# Altium PCB PCB1.PcbDoc (part 2 of 2)
Units mm, origin at the board's own origin, x right, y up, seen from the top; angles counter-clockwise.
Board outline 101 x 101.73 mm, 2 copper layers (Top Layer, Bottom Layer); 185 components, 17 nets, 503 pads, 7 vias.
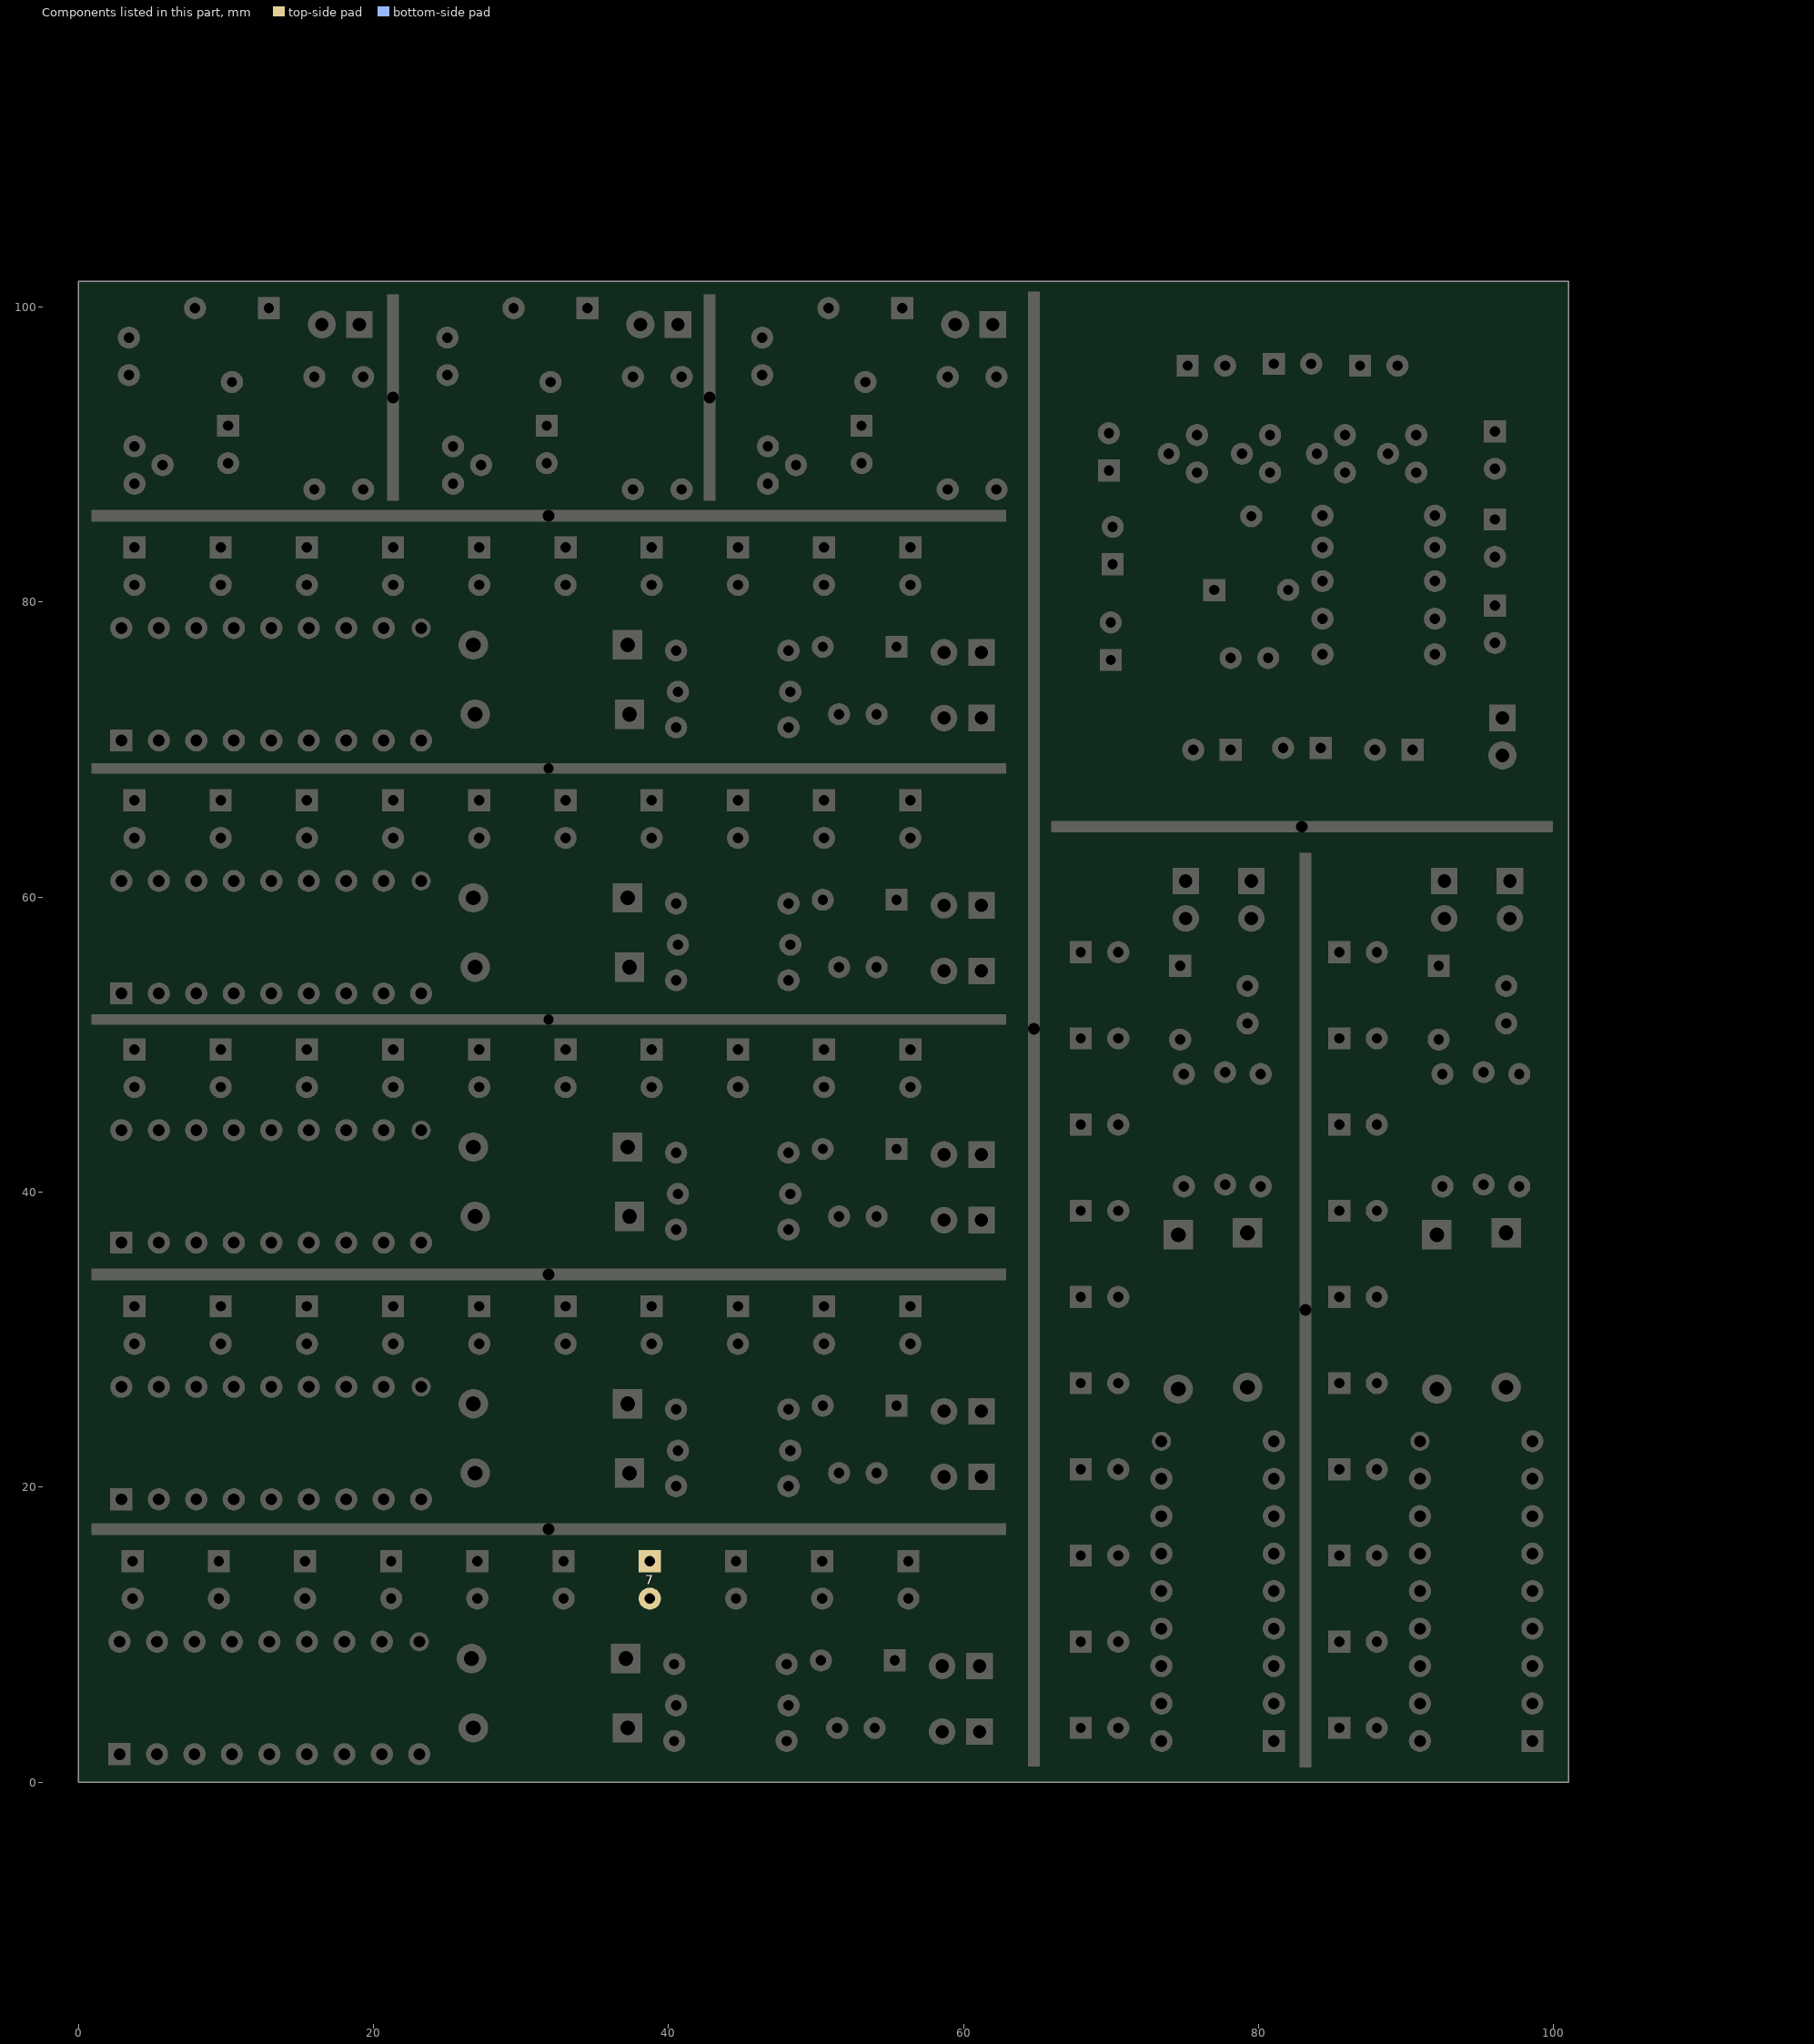
[diagram p2: the components of this part, seen from the top]

## Via types
v1: diameter 1.27, hole 0.711, Top Layer to Bottom Layer, 7 vias

## Nets (pads, with @x,y where several pads share a name; then routed paths per layer and width w, separated by ;. In a path a pad name is that pad's centre, name@x,y a point inside that pad or via, vN(x,y) a via of type N, cw(c..) or ccw(c..) an arc to the next point about the centre after c; other vN are vias at no path point) (continued)
copper on no net: | length 3967.3
  Top Layer w0.508: 2.921,19.177 4.191,20.447 4.191,28.346 3.81,28.727 3.81,29.718 ; 2.921,36.576 4.191,37.846 4.191,45.745 3.81,46.126 3.81,47.117 ; 2.921,53.467 4.191,54.737 4.191,62.636 3.81,63.017 3.81,64.008 ; 2.921,70.612 4.191,71.882 4.191,79.781 3.81,80.162 3.81,81.153 ; 3.429,95.377 5.334,97.282 14.986,97.282 16.51,98.806 ; 5.715,89.281 7.239,90.805 7.239,91.734 10.414,94.909 ; 8.001,19.177 9.271,20.447 9.271,28.067 8.382,28.956 8.382,30.988 9.652,32.258 ; 8.001,36.576 9.271,37.846 9.271,45.466 8.382,46.355 8.382,48.387 9.652,49.657 ; 8.001,53.467 9.271,54.737 9.271,62.357 8.382,63.246 8.382,65.278 9.652,66.548 ; 8.001,70.612 9.271,71.882 9.271,79.502 8.382,80.391 8.382,82.423 9.652,83.693 ; 10.541,26.797 11.811,28.067 16.383,28.067 16.891,27.559 16.891,26.047 17.399,25.539 18.923,25.539 19.431,26.047 19.431,27.737 19.939,28.245 23.393,28.245 24.867,29.718 27.178,29.718 ; 10.541,44.196 11.811,45.466 16.383,45.466 16.891,44.958 16.891,43.446 17.399,42.938 18.923,42.938 19.431,43.446 19.431,45.136 19.939,45.644 23.393,45.644 24.867,47.117 27.178,47.117 ; 10.541,61.087 11.811,62.357 16.383,62.357 16.891,61.849 16.891,60.337 17.399,59.829 18.923,59.829 19.431,60.337 19.431,62.027 19.939,62.535 23.393,62.535 24.867,64.008 27.178,64.008 ; 10.541,78.232 11.811,79.502 16.383,79.502 16.891,78.994 16.891,77.482 17.399,76.974 18.923,76.974 19.431,77.482 19.431,79.172 19.939,79.68 23.393,79.68 24.867,81.153 27.178,81.153 ; 13.081,19.177 16.891,22.987 23.461,22.987 25.256,24.782 25.256,26.272 26.187,27.203 35.685,27.203 37.234,25.654 ; 13.081,26.797 15.101,24.777 23.151,24.777 24.409,26.035 24.409,26.848 25.527,27.965 31.267,27.965 33.02,29.718 ; 13.081,36.576 16.891,40.386 23.461,40.386 25.256,42.181 25.256,43.671 26.187,44.602 35.685,44.602 37.234,43.053 ; 13.081,44.196 15.101,42.176 23.151,42.176 24.409,43.434 24.409,44.247 25.527,45.364 31.267,45.364 33.02,47.117 ; 13.081,53.467 16.891,57.277 23.461,57.277 25.256,59.072 25.256,60.562 26.187,61.493 35.685,61.493 37.234,59.944 ; 13.081,61.087 15.101,59.067 23.151,59.067 24.409,60.325 24.409,61.138 25.527,62.255 31.267,62.255 33.02,64.008 ; 13.081,70.612 16.891,74.422 23.461,74.422 25.256,76.217 25.256,77.707 26.187,78.638 35.685,78.638 37.234,77.089 ; 13.081,78.232 15.101,76.212 23.151,76.212 24.409,77.47 24.409,78.283 25.527,79.4 31.267,79.4 33.02,81.153 ; 18.161,26.797 18.161,29.718 19.431,30.988 43.434,30.988 44.704,29.718 ; 18.161,44.196 18.161,47.117 19.431,48.387 43.434,48.387 44.704,47.117 ; 18.161,61.087 18.161,64.008 19.431,65.278 43.434,65.278 44.704,64.008 ; 18.161,78.232 18.161,81.153 19.431,82.423 43.434,82.423 44.704,81.153 ; 23.241,19.177 24.511,19.177 24.892,18.796 49.403,18.796 51.562,20.955 ; 23.241,36.576 24.511,36.576 24.892,36.195 49.403,36.195 51.562,38.354 ; 23.241,53.467 24.511,53.467 24.892,53.086 49.403,53.086 51.562,55.245 ; 23.241,70.612 24.511,70.612 24.892,70.231 49.403,70.231 51.562,72.39 ; 25.019,95.377 26.924,97.282 36.576,97.282 38.1,98.806 ; 26.774,25.654 31.473,20.955 37.361,20.955 ; 26.774,43.053 31.473,38.354 37.361,38.354 ; 26.774,59.944 31.473,55.245 37.361,55.245 ; 26.774,77.089 31.473,72.39 37.361,72.39 ; 27.305,89.281 28.829,90.805 28.829,91.734 32.004,94.909 ; v1(34.315,25.654) 35.839,24.13 38.481,24.13 38.862,24.511 38.862,29.718 ; v1(34.315,43.053) 35.839,41.529 38.481,41.529 38.862,41.91 38.862,47.117 ; v1(34.315,59.944) 35.839,58.42 38.481,58.42 38.862,58.801 38.862,64.008 ; v1(34.315,77.089) 35.839,75.565 38.481,75.565 38.862,75.946 38.862,81.153 ; 46.355,95.377 48.26,97.282 57.912,97.282 59.436,98.806 ; 48.133,20.066 48.133,20.32 48.26,20.447 48.26,22.479 48.133,22.606 48.133,25.273 ; 48.133,37.465 48.133,37.719 48.26,37.846 48.26,39.878 48.133,40.005 48.133,42.672 ; 48.133,54.356 48.133,54.61 48.26,54.737 48.26,56.769 48.133,56.896 48.133,59.563 ; 48.133,71.501 48.133,71.755 48.26,71.882 48.26,73.914 48.133,74.041 48.133,76.708 ; 48.641,89.281 50.165,90.805 50.165,91.734 53.34,94.909 ; 56.388,32.258 61.214,27.432 61.214,25.146 ; 56.388,49.657 61.214,44.831 61.214,42.545 ; 56.388,66.548 61.214,61.722 61.214,59.436 ; 56.388,83.693 61.214,78.867 61.214,76.581 ; 58.674,20.701 58.674,25.146 ; 58.674,38.1 58.674,42.545 ; 58.674,54.991 58.674,59.436 ; 58.674,72.136 58.674,76.581 ; 67.945,9.525 69.215,8.255 71.247,8.255 72.136,9.144 79.756,9.144 81.026,7.874 ; 67.945,56.261 72.771,61.087 75.057,61.087 ; 69.85,88.9 71.476,87.274 71.476,83.922 70.104,82.55 71.349,81.305 71.349,77.445 69.977,76.073 ; 69.977,78.613 68.834,79.756 68.834,83.82 70.104,85.09 68.58,86.614 68.58,90.17 69.85,91.44 69.85,96.139 71.628,97.917 90.424,97.917 91.694,96.647 91.694,94.488 90.526,93.32 88.392,93.32 87.503,92.431 87.503,89.281 88.011,88.773 90.678,88.773 ; 70.485,3.683 71.476,3.683 71.857,4.064 79.756,4.064 81.026,2.794 ; 70.485,27.051 70.485,24.74 71.958,23.266 71.958,19.812 72.466,19.304 74.156,19.304 74.664,18.796 74.664,17.272 74.156,16.764 72.644,16.764 72.136,16.256 72.136,11.684 73.406,10.414 ; 70.485,32.893 72.238,31.14 72.238,25.4 73.355,24.282 74.168,24.282 75.426,23.024 75.426,14.974 73.406,12.954 ; 70.485,38.735 75.692,38.735 76.073,38.354 76.073,35.712 v1(74.549,34.188) ; 70.485,44.577 69.215,43.307 69.215,19.304 70.485,18.034 73.406,18.034 ; 74.549,26.647 79.248,31.346 79.248,37.234 ; 74.549,37.107 73,35.558 73,26.06 73.931,25.129 75.421,25.129 77.216,23.334 77.216,16.764 81.026,12.954 ; 74.93,48.006 77.597,48.006 77.724,48.133 79.756,48.133 79.883,48.006 80.137,48.006 ; 75.057,58.547 79.502,58.547 ; 75.819,88.773 77.724,90.678 77.724,96.012 ; 75.819,91.313 73.279,91.313 72.644,90.678 72.644,81.661 78.105,76.2 ; 77.002,80.812 77.423,80.391 77.55,80.391 79.375,78.566 79.375,69.723 80.899,68.199 91.313,68.199 91.948,68.834 91.948,76.454 ; 78.867,90.043 78.867,86.447 79.502,85.812 79.502,83.312 82.002,80.812 82.002,77.557 80.645,76.2 ; 79.248,51.435 81.407,49.276 81.407,24.765 81.026,24.384 81.026,23.114 ; 84.328,76.454 84.328,78.867 84.328,81.407 84.328,83.693 ; 84.328,85.852 82.677,87.503 82.677,91.821 86.868,96.012 ; 85.471,9.525 86.741,8.255 88.773,8.255 89.662,9.144 97.282,9.144 98.552,7.874 ; 85.471,56.261 90.297,61.087 92.583,61.087 ; 85.852,88.773 85.852,72.009 87.884,69.977 ; 88.011,3.683 89.002,3.683 89.383,4.064 97.282,4.064 98.552,2.794 ; 88.011,27.051 88.011,24.74 89.484,23.266 89.484,19.812 89.992,19.304 91.682,19.304 92.19,18.796 92.19,17.272 91.682,16.764 90.17,16.764 89.662,16.256 89.662,11.684 90.932,10.414 ; 88.011,32.893 89.764,31.14 89.764,25.4 90.881,24.282 91.694,24.282 92.952,23.024 92.952,14.974 90.932,12.954 ; 88.011,38.735 93.218,38.735 93.599,38.354 93.599,35.712 v1(92.075,34.188) ; 88.011,44.577 86.741,43.307 86.741,19.304 88.011,18.034 90.932,18.034 ; 90.424,69.977 90.424,82.169 91.948,83.693 ; 92.075,26.647 96.774,31.346 96.774,37.234 ; 92.075,37.107 90.526,35.558 90.526,26.06 91.457,25.129 92.947,25.129 94.742,23.334 94.742,16.764 98.552,12.954 ; 92.456,48.006 95.123,48.006 95.25,48.133 97.282,48.133 97.409,48.006 97.663,48.006 ; 92.583,58.547 97.028,58.547 ; 96.012,77.216 97.282,78.486 97.282,81.788 96.012,83.058 97.282,84.328 97.282,87.757 96.012,89.027 ; 96.012,79.756 94.742,81.026 94.742,84.328 96.012,85.598 94.742,86.868 94.742,90.297 96.012,91.567 ; 96.774,51.435 98.933,49.276 98.933,24.765 98.552,24.384 98.552,23.114
  Bottom Layer w0.508: 2.921,26.797 5.842,29.718 9.652,29.718 ; 2.921,44.196 5.842,47.117 9.652,47.117 ; 2.921,61.087 5.842,64.008 9.652,64.008 ; 2.921,78.232 5.842,81.153 9.652,81.153 ; 3.429,95.377 2.286,94.234 2.286,89.535 3.81,88.011 ; 3.429,97.917 5.421,99.909 7.914,99.909 7.914,97.409 10.414,94.909 ; 3.81,32.258 9.652,32.258 15.494,32.258 21.336,32.258 27.178,32.258 33.02,32.258 38.862,32.258 44.704,32.258 50.546,32.258 56.388,32.258 ; 3.81,49.657 9.652,49.657 15.494,49.657 21.336,49.657 27.178,49.657 33.02,49.657 38.862,49.657 44.704,49.657 50.546,49.657 56.388,49.657 ; 3.81,66.548 9.652,66.548 15.494,66.548 21.336,66.548 27.178,66.548 33.02,66.548 38.862,66.548 44.704,66.548 50.546,66.548 56.388,66.548 ; 3.81,83.693 9.652,83.693 15.494,83.693 21.336,83.693 27.178,83.693 33.02,83.693 38.862,83.693 44.704,83.693 50.546,83.693 56.388,83.693 ; 3.81,90.551 4.445,91.186 8.382,91.186 10.16,89.408 ; 5.461,19.177 6.719,17.919 9.283,17.919 10.541,19.177 14.757,23.393 24.463,23.393 26.901,20.955 29.949,24.003 44.196,24.003 48.133,20.066 ; 5.461,26.797 3.886,25.222 2.159,25.222 1.651,25.73 1.651,30.099 2.54,30.988 14.224,30.988 15.494,29.718 ; 5.461,36.576 6.719,35.318 9.283,35.318 10.541,36.576 14.757,40.792 24.463,40.792 26.901,38.354 29.949,41.402 44.196,41.402 48.133,37.465 ; 5.461,44.196 3.886,42.621 2.159,42.621 1.651,43.129 1.651,47.498 2.54,48.387 14.224,48.387 15.494,47.117 ; 5.461,53.467 6.719,52.209 9.283,52.209 10.541,53.467 14.757,57.683 24.463,57.683 26.901,55.245 29.949,58.293 44.196,58.293 48.133,54.356 ; 5.461,61.087 3.886,59.512 2.159,59.512 1.651,60.02 1.651,64.389 2.54,65.278 14.224,65.278 15.494,64.008 ; 5.461,70.612 6.719,69.354 9.283,69.354 10.541,70.612 14.757,74.828 24.463,74.828 26.901,72.39 29.949,75.438 44.196,75.438 48.133,71.501 ; 5.461,78.232 3.886,76.657 2.159,76.657 1.651,77.165 1.651,81.534 2.54,82.423 14.224,82.423 15.494,81.153 ; 8.001,26.797 9.474,28.27 19.888,28.27 21.336,29.718 ; 8.001,44.196 9.474,45.669 19.888,45.669 21.336,47.117 ; 8.001,61.087 9.474,62.56 19.888,62.56 21.336,64.008 ; 8.001,78.232 9.474,79.705 19.888,79.705 21.336,81.153 ; 10.16,91.948 11.684,91.948 16.002,87.63 ; 12.914,99.909 12.914,94.02 19.304,87.63 ; 15.621,19.177 18.161,19.177 20.193,21.209 24.273,21.209 26.035,19.447 31.41,19.447 35.204,23.241 39.878,23.241 40.64,22.479 ; 15.621,26.797 18.263,24.155 26.492,24.155 26.518,24.13 28.88,24.13 30.404,25.654 v1(34.315,25.654) ; 15.621,36.576 18.161,36.576 20.193,38.608 24.273,38.608 26.035,36.846 31.41,36.846 35.204,40.64 39.878,40.64 40.64,39.878 ; 15.621,44.196 18.263,41.554 26.492,41.554 26.518,41.529 28.88,41.529 30.404,43.053 v1(34.315,43.053) ; 15.621,53.467 18.161,53.467 20.193,55.499 24.273,55.499 26.035,53.737 31.41,53.737 35.204,57.531 39.878,57.531 40.64,56.769 ; 15.621,61.087 18.263,58.445 26.492,58.445 26.518,58.42 28.88,58.42 30.404,59.944 v1(34.315,59.944) ; 15.621,70.612 18.161,70.612 20.193,72.644 24.273,72.644 26.035,70.882 31.41,70.882 35.204,74.676 39.878,74.676 40.64,73.914 ; 15.621,78.232 18.263,75.59 26.492,75.59 26.518,75.565 28.88,75.565 30.404,77.089 v1(34.315,77.089) ; 16.002,95.25 19.304,95.25 19.05,95.504 19.05,98.806 ; 20.701,19.177 21.971,20.447 23.876,20.447 25.638,18.685 32.045,18.685 35.839,22.479 38.608,22.479 39.116,21.971 39.116,21.463 40.513,20.066 ; 20.701,26.797 22.352,28.448 45.974,28.448 47.244,29.718 50.546,29.718 ; 20.701,36.576 21.971,37.846 23.876,37.846 25.638,36.084 32.045,36.084 35.839,39.878 38.608,39.878 39.116,39.37 39.116,38.862 40.513,37.465 ; 20.701,44.196 22.352,45.847 45.974,45.847 47.244,47.117 50.546,47.117 ; 20.701,53.467 21.971,54.737 23.876,54.737 25.638,52.975 32.045,52.975 35.839,56.769 38.608,56.769 39.116,56.261 39.116,55.753 40.513,54.356 ; 20.701,61.087 22.352,62.738 45.974,62.738 47.244,64.008 50.546,64.008 ; 20.701,70.612 21.971,71.882 23.876,71.882 25.638,70.12 32.045,70.12 35.839,73.914 38.608,73.914 39.116,73.406 39.116,72.898 40.513,71.501 ; 20.701,78.232 22.352,79.883 45.974,79.883 47.244,81.153 50.546,81.153 ; 23.241,26.797 24.123,27.679 46.355,27.679 46.867,28.19 54.86,28.19 56.388,29.718 ; 23.241,44.196 24.123,45.078 46.355,45.078 46.867,45.589 54.86,45.589 56.388,47.117 ; 23.241,61.087 24.123,61.969 46.355,61.969 46.867,62.48 54.86,62.48 56.388,64.008 ; 23.241,78.232 24.123,79.114 46.355,79.114 46.867,79.625 54.86,79.625 56.388,81.153 ; 25.019,95.377 23.876,94.234 23.876,89.535 25.4,88.011 ; 25.019,97.917 27.011,99.909 29.504,99.909 29.504,97.409 32.004,94.909 ; 25.4,90.551 26.035,91.186 29.972,91.186 31.75,89.408 ; 31.75,91.948 33.274,91.948 37.592,87.63 ; 34.504,99.909 34.504,94.02 40.894,87.63 ; 37.234,25.654 38.659,25.654 39.04,25.273 40.513,25.273 45.352,25.273 47.486,27.407 53.579,27.407 55.459,25.527 ; 37.234,43.053 38.659,43.053 39.04,42.672 40.513,42.672 45.352,42.672 47.486,44.806 53.579,44.806 55.459,42.926 ; 37.234,59.944 38.659,59.944 39.04,59.563 40.513,59.563 45.352,59.563 47.486,61.697 53.579,61.697 55.459,59.817 ; 37.234,77.089 38.659,77.089 39.04,76.708 40.513,76.708 45.352,76.708 47.486,78.842 53.579,78.842 55.459,76.962 ; 37.361,20.955 39.52,18.796 59.309,18.796 61.214,20.701 ; 37.361,38.354 39.52,36.195 59.309,36.195 61.214,38.1 ; 37.361,55.245 39.52,53.086 59.309,53.086 61.214,54.991 ; 37.361,72.39 39.52,70.231 59.309,70.231 61.214,72.136 ; 37.592,95.25 40.894,95.25 40.64,95.504 40.64,98.806 ; 46.355,95.377 45.212,94.234 45.212,89.535 46.736,88.011 ; 46.355,97.917 48.347,99.909 50.84,99.909 50.84,97.409 53.34,94.909 ; 46.736,90.551 47.371,91.186 51.308,91.186 53.086,89.408 ; 48.133,25.273 49.149,25.273 49.403,25.527 50.459,25.527 51.831,24.155 57.683,24.155 58.674,25.146 ; 48.133,42.672 49.149,42.672 49.403,42.926 50.459,42.926 51.831,41.554 57.683,41.554 58.674,42.545 ; 48.133,59.563 49.149,59.563 49.403,59.817 50.459,59.817 51.831,58.445 57.683,58.445 58.674,59.436 ; 48.133,76.708 49.149,76.708 49.403,76.962 50.459,76.962 51.831,75.59 57.683,75.59 58.674,76.581 ; 53.086,91.948 54.61,91.948 58.928,87.63 ; 54.102,20.955 55.245,22.098 58.166,22.098 61.214,25.146 ; 54.102,38.354 55.245,39.497 58.166,39.497 61.214,42.545 ; 54.102,55.245 55.245,56.388 58.166,56.388 61.214,59.436 ; 54.102,72.39 55.245,73.533 58.166,73.533 61.214,76.581 ; 55.84,99.909 55.84,94.02 62.23,87.63 ; 58.928,95.25 62.23,95.25 61.976,95.504 61.976,98.806 ; 67.945,3.683 67.945,9.525 67.945,15.367 67.945,21.209 67.945,27.051 67.945,32.893 67.945,38.735 67.945,44.577 67.945,50.419 67.945,56.261 ; 70.104,82.55 73.127,79.527 83.209,79.527 83.819,80.137 90.678,80.137 91.948,81.407 ; 70.485,9.525 70.485,5.715 73.406,2.794 ; 70.485,15.367 69.215,14.097 69.215,2.413 70.104,1.524 74.473,1.524 74.981,2.032 74.981,3.759 73.406,5.334 ; 70.485,21.209 71.933,19.761 71.933,9.347 73.406,7.874 ; 70.485,50.419 70.485,47.117 71.755,45.847 71.755,22.225 73.406,20.574 ; 70.485,56.261 72.013,54.733 72.013,46.74 72.524,46.228 72.524,23.996 73.406,23.114 ; 73.406,15.494 76.048,18.136 76.048,26.365 76.073,26.391 76.073,28.753 74.549,30.277 v1(74.549,34.188) ; 73.914,90.043 78.867,90.043 83.947,90.043 88.773,90.043 ; 74.549,37.107 74.549,38.532 74.93,38.913 74.93,40.386 74.93,45.225 72.796,47.359 72.796,53.452 74.676,55.332 ; 74.93,48.006 74.93,49.022 74.676,49.276 74.676,50.332 76.048,51.704 76.048,57.556 75.057,58.547 ; 75.057,61.087 78.105,58.039 78.105,55.118 79.248,53.975 ; 75.184,96.012 76.556,94.64 79.527,94.64 81.026,96.139 82.398,94.767 85.623,94.767 86.868,96.012 ; 75.565,69.977 76.835,68.707 80.264,68.707 81.661,70.104 83.566,68.199 86.106,68.199 87.884,69.977 ; 75.819,91.313 80.772,91.313 85.852,91.313 90.678,91.313 ; 77.724,40.513 76.962,39.751 76.962,35.077 80.756,31.283 80.756,25.908 78.994,24.146 78.994,20.066 81.026,18.034 81.026,15.494 ; 77.724,96.012 79.197,97.485 82.22,97.485 83.566,96.139 84.785,97.358 88.062,97.358 89.408,96.012 ; 78.105,69.977 79.604,71.476 82.829,71.476 84.201,70.104 85.446,71.349 89.052,71.349 90.424,69.977 ; 78.105,76.2 81.661,72.644 93.472,72.644 96.52,69.596 ; 79.248,37.234 81.407,39.393 81.407,59.182 79.502,61.087 ; 80.137,40.386 78.74,38.989 78.232,38.989 77.724,38.481 77.724,35.712 81.518,31.918 81.518,25.511 79.756,23.749 79.756,21.844 81.026,20.574 ; 80.137,48.006 76.2,44.069 76.2,29.822 79.248,26.774 76.81,24.336 76.81,14.63 81.026,10.414 82.284,9.156 82.284,6.592 81.026,5.334 ; 80.772,88.773 82.042,87.503 94.488,87.503 96.012,89.027 ; 84.328,76.454 86.843,73.939 94.717,73.939 96.52,72.136 ; 84.328,83.693 86.487,85.852 91.948,85.852 ; 85.471,3.683 85.471,9.525 85.471,15.367 85.471,21.209 85.471,27.051 85.471,32.893 85.471,38.735 85.471,44.577 85.471,50.419 85.471,56.261 ; 88.011,9.525 88.011,5.715 90.932,2.794 ; 88.011,15.367 86.741,14.097 86.741,2.413 87.63,1.524 91.999,1.524 92.507,2.032 92.507,3.759 90.932,5.334 ; 88.011,21.209 89.459,19.761 89.459,9.347 90.932,7.874 ; 88.011,50.419 88.011,47.117 89.281,45.847 89.281,22.225 90.932,20.574 ; 88.011,56.261 89.539,54.733 89.539,46.74 90.05,46.228 90.05,23.996 90.932,23.114 ; 90.932,15.494 93.574,18.136 93.574,26.365 93.599,26.391 93.599,28.753 92.075,30.277 v1(92.075,34.188) ; 91.948,78.867 92.837,79.756 96.012,79.756 ; 92.075,37.107 92.075,38.532 92.456,38.913 92.456,40.386 92.456,45.225 90.322,47.359 90.322,53.452 92.202,55.332 ; 92.456,48.006 92.456,49.022 92.202,49.276 92.202,50.332 93.574,51.704 93.574,57.556 92.583,58.547 ; 92.583,61.087 95.631,58.039 95.631,55.118 96.774,53.975 ; 95.25,40.513 94.488,39.751 94.488,35.077 98.282,31.283 98.282,25.908 96.52,24.146 96.52,20.066 98.552,18.034 98.552,15.494 ; 96.774,37.234 98.933,39.393 98.933,59.182 97.028,61.087 ; 97.663,40.386 96.266,38.989 95.758,38.989 95.25,38.481 95.25,35.712 99.044,31.918 99.044,25.511 97.282,23.749 97.282,21.844 98.552,20.574 ; 97.663,48.006 93.726,44.069 93.726,29.822 96.774,26.774 94.336,24.336 94.336,14.63 98.552,10.414 99.81,9.156 99.81,6.592 98.552,5.334

## Keep-outs
Keep-Out Layer:
  the board outline again, w0.254

## Silkscreen, mask and mechanical layers (free items; w line width, h text height)
Top Overlay:
  lines w0.254: 1.264,4.699 ccw(c1.264,5.842) 1.27,6.985 ; 1.391,21.971 ccw(c1.391,23.114) 1.397,24.257 ; 1.391,39.37 ccw(c1.391,40.513) 1.397,41.656 ; 1.391,56.261 ccw(c1.391,57.404) 1.397,58.547 ; 1.391,73.406 ccw(c1.391,74.549) 1.397,75.692 ; 4.572,93.091 4.572,93.726 ; 5.207,93.726 4.572,93.726 ; 5.588,93.853 5.588,94.488 ; 6.096,92.202 4.572,93.726 ; 6.35,94.488 5.588,94.488 ; 6.985,93.091 5.588,94.488 ; 11.938,88.392 13.335,86.995 ; 12.573,86.995 13.335,86.995 ; 12.7,89.154 14.224,87.63 ; 13.335,87.63 13.335,86.995 ; 13.589,87.63 14.224,87.63 ; 14.224,88.265 14.224,87.63 ; 26.162,93.091 26.162,93.726 ; 26.797,93.726 26.162,93.726 ; 27.178,93.853 27.178,94.488 ; 27.686,92.202 26.162,93.726 ; 27.94,94.488 27.178,94.488 ; 28.575,93.091 27.178,94.488 ; 33.528,88.392 34.925,86.995 ; 34.163,86.995 34.925,86.995 ; 34.29,89.154 35.814,87.63 ; 34.925,87.63 34.925,86.995 ; 35.179,87.63 35.814,87.63 ; 35.814,88.265 35.814,87.63 ; 47.498,93.091 47.498,93.726 ; 48.133,93.726 47.498,93.726 ; 48.514,93.853 48.514,94.488 ; 49.022,92.202 47.498,93.726 ; 49.276,94.488 48.514,94.488 ; 49.911,93.091 48.514,94.488 ; 54.864,88.392 56.261,86.995 ; 55.499,86.995 56.261,86.995 ; 55.626,89.154 57.15,87.63 ; 56.261,87.63 56.261,86.995 ; 56.515,87.63 57.15,87.63 ; 57.15,88.265 57.15,87.63 ; 74.295,77.597 76.327,75.565 ; 74.422,80.01 76.708,77.724 ; 75.438,75.565 76.327,75.565 ; 75.565,77.724 76.708,77.724 ; 75.946,1.27 cw(c77.089,1.264) 78.232,1.264 ; 76.327,76.581 76.327,75.565 ; 76.708,78.74 76.708,77.724 ; 93.472,1.27 cw(c94.615,1.264) 95.758,1.264 ; 0.381,86.487 0.381,101.346 20.701,101.346 20.701,86.487 0.381,86.487 ; 0.508,0.508 62.992,0.508 62.992,16.51 0.508,16.51 0.508,0.508 ; 0.635,17.78 0.635,33.782 63.119,33.782 63.119,17.78 0.635,17.78 ; 0.635,35.179 0.635,51.181 63.119,51.181 63.119,35.179 0.635,35.179 ; 0.635,52.07 0.635,68.072 63.119,68.072 63.119,52.07 0.635,52.07 ; 0.635,69.215 0.635,85.217 63.119,85.217 63.119,69.215 0.635,69.215 ; 21.971,86.487 21.971,101.346 42.291,101.346 42.291,86.487 21.971,86.487 ; 43.307,86.487 43.307,101.346 63.627,101.346 63.627,86.487 43.307,86.487 ; 66.421,0.508 82.423,0.508 82.423,62.992 66.421,62.992 66.421,0.508 ; 66.802,66.929 66.802,99.187 99.06,99.187 99.06,66.929 66.802,66.929 ; 83.947,0.508 99.949,0.508 99.949,62.992 83.947,62.992 83.947,0.508
  text "-" at 15.748,101.092 h1.3 r270
  text "+" at 18.288,101.092 h1.52 r270
  text "-" at 37.338,101.092 h1.3 r270
  text "+" at 39.878,101.092 h1.52 r270
  text "-" at 58.674,101.092 h1.3 r270
  text "+" at 61.214,101.092 h1.52 r270
  text "PRESET" at 9.017,100.457 h0.8 r270
  text "PRESET" at 30.607,100.457 h0.8 r270
  text "PRESET" at 51.943,100.457 h0.8 r270
  text "100K" at 10.668,100.203 h1.2 r270
  text "100K" at 32.258,100.203 h1.2 r270
  text "100K" at 53.594,100.203 h1.2 r270
  text "LDR" at 1.524,99.568 h1.3
  text "LDR" at 23.114,99.568 h1.3
  text "LDR" at 44.45,99.568 h1.3
  text "9V" at 18.669,97.155 h1.2 r180
  text "9V" at 40.259,97.155 h1.2 r180
  text "9V" at 61.595,97.155 h1.2 r180
  text "+" at 80.518,96.901 h1.52
  text "+" at 86.487,96.901 h1.52
  text "+" at 74.676,96.774 h1.52
  text "-" at 77.089,96.52 h1.52
  text "-" at 83.058,96.52 h1.52
  text "-" at 88.773,96.52 h1.52
  text "12 / LEDs" at 67.564,93.345 h1.5
  text "LED" at 13.081,92.837 h1.3 r270
  text "LED" at 34.671,92.837 h1.3 r270
  text "LED" at 56.007,92.837 h1.3 r270
  text "DARK / SENSITIVE / CIRCUIT" at 88.392,92.583 h0.9
  text "BC547" at 0.762,92.329 h1.1 r270
  text "+" at 10.922,92.329 h1.52 r270
  text "1K" at 15.494,92.329 h1 r270
  text "1K" at 18.796,92.329 h1 r270
  text "BC547" at 22.352,92.329 h1.1 r270
  text "+" at 32.512,92.329 h1.52 r270
  text "1K" at 37.084,92.329 h1 r270
  text "1K" at 40.386,92.329 h1 r270
  text "BC547" at 43.688,92.329 h1.1 r270
  text "+" at 53.848,92.329 h1.52 r270
  text "1K" at 58.42,92.329 h1 r270
  text "1K" at 61.722,92.329 h1 r270
  text "+" at 97.028,90.678 h1.52
  text "-" at 67.818,90.297 h1.52
  text "-" at 10.668,89.789 h1.3 r270
  text "-" at 32.258,89.789 h1.3 r270
  text "-" at 53.594,89.789 h1.3 r270
  text "A.I. PCB" at 18.034,88.773 h0.9 r90
  text "A.I. PCB" at 39.624,88.773 h0.9 r90
  text "A.I. PCB" at 60.96,88.773 h0.9 r90
  text "BC547" at 77.343,88.519 h0.7 r90
  text "BC547" at 82.296,88.519 h0.7 r90
  text "BC547" at 87.376,88.519 h0.7 r90
  text "BC547" at 92.202,88.519 h0.7 r90
  text "-" at 97.155,88.392 h1.52
  text "+" at 67.818,88.265 h1.52
  text "100" at 86.614,85.344 h1
  text "+" at 97.028,84.709 h1.52
  text "-" at 68.072,83.947 h1.52
  text "100" at 86.614,83.185 h1
  text "100K" at 76.962,82.804 h1.5
  text "+" at 1.905,82.677 h1.3
  text "+" at 7.62,82.677 h1.3
  text "+" at 13.462,82.677 h1.3
  text "+" at 19.304,82.677 h1.3
  text "+" at 25.146,82.677 h1.3
  text "+" at 30.988,82.677 h1.3
  text "+" at 36.83,82.677 h1.3
  text "+" at 42.672,82.677 h1.3
  text "+" at 48.514,82.677 h1.3
  text "+" at 54.356,82.677 h1.3
  text "-" at 97.028,82.423 h1.52
  text "+" at 67.945,82.169 h1.52
  text "10" at 57.277,81.788 h1
  text "1" at 5.08,81.661 h1.52
  text "2" at 10.795,81.661 h1.52
  text "3" at 16.637,81.661 h1.52
  text "4" at 22.352,81.661 h1.52
  text "5" at 28.321,81.661 h1.52
  text "7" at 40.005,81.661 h1.52
  text "9" at 51.689,81.661 h1.52
  text "6" at 34.036,81.534 h1.52
  text "8" at 45.847,81.534 h1.52
  text "12V" at 59.309,80.899 h1.3
  text "100" at 86.614,80.899 h1
  text "-" at 1.905,80.518 h1.3
  text "-" at 7.747,80.518 h1.3
  text "-" at 13.462,80.518 h1.3
  text "-" at 19.431,80.518 h1.3
  text "-" at 25.273,80.518 h1.3
  text "-" at 31.115,80.518 h1.3
  text "-" at 36.957,80.518 h1.3
  text "-" at 42.799,80.518 h1.3
  text "-" at 48.641,80.518 h1.3
  text "-" at 54.483,80.518 h1.3
  text "POWER" at 58.039,79.375 h1
  text "+" at 97.028,78.867 h1.52
  text "100" at 86.614,78.359 h1
  text "AI PCB" at 41.529,77.978 h1.2
  text "+" at 60.833,77.978 h1.3
  text "-" at 58.166,77.724 h1.3
  text "-" at 67.945,77.597 h1.52
  text "LDR" at 78.232,77.089 h1.1
  text "1uF" at 51.562,76.454 h1.1
  text "-" at 97.028,76.454 h1.52
  text "100K" at 42.672,76.2 h1
  text "1k" at 87.503,75.946 h1
  text "+" at 67.945,75.565 h1.52
  text "1N4007" at 29.337,74.168 h1
  text "7mm LDR" at 77.978,74.041 h1
  text "GND" at 57.15,73.66 h0.6
  text "SIGNAL" at 59.69,73.66 h0.6
  text "+" at 96.012,73.533 h1.52
  text "LM3915" at 6.985,73.406 h2.4
  text "2.2K" at 42.545,73.406 h1
  text "A.I. PCB" at 67.564,72.771 h1.2
  text "2.2K" at 42.545,70.993 h1
  text "1N4007" at 29.464,69.596 h1
  text "VU" at 36.322,69.596 h1.6
  text "DOT/BAR" at 49.53,69.596 h1
  text "AUDIO" at 57.531,69.596 h1
  text "METER" at 39.37,69.469 h0.9
  text "9V" at 94.488,69.215 h1.52 r90
  text "-" at 81.153,68.072 h1.52
  text "-" at 75.057,67.945 h1.52
  text "-" at 87.503,67.818 h1.52
  text "+" at 77.343,67.691 h1.52
  text "+" at 83.439,67.691 h1.52
  text "+" at 89.662,67.691 h1.52
  text "-" at 96.139,66.929 h1.52
  text "+" at 1.905,65.532 h1.3
  text "+" at 7.62,65.532 h1.3
  text "+" at 13.462,65.532 h1.3
  text "+" at 19.304,65.532 h1.3
  text "+" at 25.146,65.532 h1.3
  text "+" at 30.988,65.532 h1.3
  text "+" at 36.83,65.532 h1.3
  text "+" at 42.672,65.532 h1.3
  text "+" at 48.514,65.532 h1.3
  text "+" at 54.356,65.532 h1.3
  text "10" at 57.277,64.643 h1
  text "1" at 5.08,64.516 h1.52
  text "2" at 10.795,64.516 h1.52
  text "3" at 16.637,64.516 h1.52
  text "4" at 22.352,64.516 h1.52
  text "5" at 28.321,64.516 h1.52
  text "7" at 40.005,64.516 h1.52
  text "9" at 51.689,64.516 h1.52
  text "6" at 34.036,64.389 h1.52
  text "8" at 45.847,64.389 h1.52
  text "12V" at 59.309,63.627 h1.3
  text "-" at 1.905,63.373 h1.3
  text "-" at 7.747,63.373 h1.3
  text "-" at 13.462,63.373 h1.3
  text "-" at 19.431,63.373 h1.3
  text "-" at 25.273,63.373 h1.3
  text "-" at 31.115,63.373 h1.3
  text "-" at 36.957,63.373 h1.3
  text "-" at 42.799,63.373 h1.3
  text "-" at 48.641,63.373 h1.3
  text "-" at 54.483,63.373 h1.3
  text "POWER" at 58.039,62.23 h1
  text "AI PCB" at 41.529,60.833 h1.2
  text "+" at 60.833,60.833 h1.3
  text "+" at 73.66,60.706 h1.3 r90
  text "+" at 91.186,60.706 h1.3 r90
  text "-" at 58.166,60.579 h1.3
  text "SIGNAL" at 77.978,59.563 h0.6 r90
  text "SIGNAL" at 95.504,59.563 h0.6 r90
  text "1uF" at 51.562,59.309 h1.1
  text "12V" at 70.739,59.309 h1.3 r90
  text "12V" at 88.265,59.309 h1.3 r90
  text "100K" at 42.672,59.055 h1
  text "-" at 73.914,58.039 h1.3 r90
  text "-" at 91.44,58.039 h1.3 r90
  text "POWER" at 72.263,57.912 h1 r90
  text "POWER" at 89.789,57.912 h1 r90
  text "AUDIO" at 82.042,57.404 h1 r90
  text "AUDIO" at 99.568,57.404 h1 r90
  text "10" at 69.85,57.15 h1 r90
  text "10" at 87.376,57.15 h1 r90
  text "1N4007" at 29.337,57.023 h1
  text "GND" at 77.978,57.023 h0.6 r90
  text "GND" at 95.504,57.023 h0.6 r90
  text "GND" at 57.15,56.515 h0.6
  text "SIGNAL" at 59.69,56.515 h0.6
  text "LM3915" at 6.985,56.261 h2.4
  text "2.2K" at 42.545,56.261 h1
  text "-" at 71.12,54.356 h1.3 r90
  text "-" at 88.646,54.356 h1.3 r90
  text "+" at 68.961,54.229 h1.3 r90
  text "+" at 86.487,54.229 h1.3 r90
  text "2.2K" at 42.545,53.848 h1
  text "1N4007" at 29.464,52.451 h1
  text "VU" at 36.322,52.451 h1.6
  text "DOT/BAR" at 49.53,52.451 h1
  text "AUDIO" at 57.531,52.451 h1
  text "METER" at 39.37,52.324 h0.9
  text "9" at 69.977,51.562 h1.52 r90
  text "9" at 87.503,51.562 h1.52 r90
  text "1uF" at 75.184,51.435 h1.1 r90
  text "1uF" at 92.71,51.435 h1.1 r90
  text "DOT/BAR" at 82.042,49.403 h1 r90
  text "DOT/BAR" at 99.568,49.403 h1 r90
  text "+" at 1.905,48.641 h1.3
  text "+" at 7.62,48.641 h1.3
  text "+" at 13.462,48.641 h1.3
  text "+" at 19.304,48.641 h1.3
  text "+" at 25.146,48.641 h1.3
  text "+" at 30.988,48.641 h1.3
  text "+" at 36.83,48.641 h1.3
  text "+" at 42.672,48.641 h1.3
  text "+" at 48.514,48.641 h1.3
  text "+" at 54.356,48.641 h1.3
  text "-" at 71.12,48.514 h1.3 r90
  text "-" at 88.646,48.514 h1.3 r90
  text "+" at 68.961,48.387 h1.3 r90
  text "+" at 86.487,48.387 h1.3 r90
  text "10" at 57.277,47.752 h1
  text "1" at 5.08,47.625 h1.52
  text "2" at 10.795,47.625 h1.52
  text "3" at 16.637,47.625 h1.52
  text "4" at 22.352,47.625 h1.52
  text "5" at 28.321,47.625 h1.52
  text "7" at 40.005,47.625 h1.52
  text "9" at 51.689,47.625 h1.52
  text "6" at 34.036,47.498 h1.52
  text "8" at 45.847,47.498 h1.52
  text "12V" at 59.309,46.863 h1.3
  text "-" at 1.905,46.482 h1.3
  text "-" at 7.747,46.482 h1.3
  text "-" at 13.462,46.482 h1.3
  text "-" at 19.431,46.482 h1.3
  text "-" at 25.273,46.482 h1.3
  text "-" at 31.115,46.482 h1.3
  text "-" at 36.957,46.482 h1.3
  text "-" at 42.799,46.482 h1.3
  text "-" at 48.641,46.482 h1.3
  text "-" at 54.483,46.482 h1.3
  text "8" at 70.104,45.72 h1.52 r90
  text "8" at 87.63,45.72 h1.52 r90
  text "POWER" at 58.039,45.339 h1
  text "AI PCB" at 41.529,43.942 h1.2
  text "+" at 60.833,43.942 h1.3
  text "-" at 58.166,43.688 h1.3
  text "-" at 71.12,42.672 h1.3 r90
  text "-" at 88.646,42.672 h1.3 r90
  text "+" at 68.961,42.545 h1.3 r90
  text "100K" at 75.438,42.545 h1 r90
  text "+" at 86.487,42.545 h1.3 r90
  text "100K" at 92.964,42.545 h1 r90
  text "1uF" at 51.562,42.418 h1.1
  text "2.2K" at 78.232,42.418 h1 r90
  text "2.2K" at 80.645,42.418 h1 r90
  text "2.2K" at 95.758,42.418 h1 r90
  text "2.2K" at 98.171,42.418 h1 r90
  text "100K" at 42.672,42.164 h1
  text "AI PCB" at 73.66,41.402 h1.2 r90
  text "AI PCB" at 91.186,41.402 h1.2 r90
  text "1N4007" at 29.337,40.132 h1
  text "7" at 69.977,39.878 h1.52 r90
  text "7" at 87.503,39.878 h1.52 r90
  text "GND" at 57.15,39.624 h0.6
  text "SIGNAL" at 59.69,39.624 h0.6
  text "LM3915" at 6.985,39.37 h2.4
  text "2.2K" at 42.545,39.37 h1
  text "METER" at 82.169,39.243 h0.9 r90
  text "METER" at 99.695,39.243 h0.9 r90
  text "2.2K" at 42.545,36.957 h1
  text "-" at 71.12,36.83 h1.3 r90
  text "-" at 88.646,36.83 h1.3 r90
  text "+" at 68.961,36.703 h1.3 r90
  text "+" at 86.487,36.703 h1.3 r90
  text "VU" at 82.042,36.195 h1.6 r90
  text "VU" at 99.568,36.195 h1.6 r90
  text "1N4007" at 29.464,35.56 h1
  text "VU" at 36.322,35.56 h1.6
  text "DOT/BAR" at 49.53,35.56 h1
  text "AUDIO" at 57.531,35.56 h1
  text "METER" at 39.37,35.433 h0.9
  text "6" at 70.104,33.909 h1.52 r90
  text "6" at 87.63,33.909 h1.52 r90
  text "+" at 1.905,31.242 h1.3
  text "+" at 7.62,31.242 h1.3
  text "+" at 13.462,31.242 h1.3
  text "+" at 19.304,31.242 h1.3
  text "+" at 25.146,31.242 h1.3
  text "+" at 30.988,31.242 h1.3
  text "+" at 36.83,31.242 h1.3
  text "+" at 42.672,31.242 h1.3
  text "+" at 48.514,31.242 h1.3
  text "+" at 54.356,31.242 h1.3
  text "-" at 71.12,30.988 h1.3 r90
  text "-" at 88.646,30.988 h1.3 r90
  text "+" at 68.961,30.861 h1.3 r90
  text "+" at 86.487,30.861 h1.3 r90
  text "10" at 57.277,30.353 h1
  text "1" at 5.08,30.226 h1.52
  text "2" at 10.795,30.226 h1.52
  text "3" at 16.637,30.226 h1.52
  text "4" at 22.352,30.226 h1.52
  text "5" at 28.321,30.226 h1.52
  text "7" at 40.005,30.226 h1.52
  text "9" at 51.689,30.226 h1.52
  text "6" at 34.036,30.099 h1.52
  text "8" at 45.847,30.099 h1.52
  text "12V" at 59.309,29.337 h1.3
  text "1N4007" at 82.042,29.337 h1 r90
  text "1N4007" at 99.568,29.337 h1 r90
  text "1N4007" at 77.47,29.21 h1 r90
  text "1N4007" at 94.996,29.21 h1 r90
  text "-" at 1.905,29.083 h1.3
  text "-" at 7.747,29.083 h1.3
  text "-" at 13.462,29.083 h1.3
  text "-" at 19.431,29.083 h1.3
  text "-" at 25.273,29.083 h1.3
  text "-" at 31.115,29.083 h1.3
  text "-" at 36.957,29.083 h1.3
  text "-" at 42.799,29.083 h1.3
  text "-" at 48.641,29.083 h1.3
  text "-" at 54.483,29.083 h1.3
  text "5" at 69.977,28.194 h1.52 r90
  text "5" at 87.503,28.194 h1.52 r90
  text "POWER" at 58.039,27.94 h1
  text "AI PCB" at 41.529,26.543 h1.2
  text "+" at 60.833,26.543 h1.3
  text "-" at 58.166,26.289 h1.3
  text "-" at 71.12,25.146 h1.3 r90
  text "-" at 88.646,25.146 h1.3 r90
  text "1uF" at 51.562,25.019 h1.1
  text "+" at 68.961,25.019 h1.3 r90
  text "+" at 86.487,25.019 h1.3 r90
  text "100K" at 42.672,24.765 h1
  text "1N4007" at 29.337,22.733 h1
  text "GND" at 57.15,22.225 h0.6
  text "SIGNAL" at 59.69,22.225 h0.6
  text "4" at 69.977,22.225 h1.52 r90
  text "4" at 87.503,22.225 h1.52 r90
  text "LM3915" at 6.985,21.971 h2.4
  text "2.2K" at 42.545,21.971 h1
  text "2.2K" at 42.545,19.558 h1
  text "-" at 71.12,19.304 h1.3 r90
  text "-" at 88.646,19.304 h1.3 r90
  text "+" at 68.961,19.177 h1.3 r90
  text "+" at 86.487,19.177 h1.3 r90
  text "1N4007" at 29.464,18.161 h1
  text "VU" at 36.322,18.161 h1.6
  text "DOT/BAR" at 49.53,18.161 h1
  text "AUDIO" at 57.531,18.161 h1
  text "METER" at 39.37,18.034 h0.9
  text "3" at 69.977,16.51 h1.52 r90
  text "3" at 87.503,16.51 h1.52 r90
  text "+" at 1.778,13.97 h1.3
  text "+" at 7.493,13.97 h1.3
  text "+" at 13.335,13.97 h1.3
  text "+" at 19.177,13.97 h1.3
  text "+" at 25.019,13.97 h1.3
  text "+" at 30.861,13.97 h1.3
  text "+" at 36.703,13.97 h1.3
  text "+" at 42.545,13.97 h1.3
  text "+" at 48.387,13.97 h1.3
  text "+" at 54.229,13.97 h1.3
  text "+" at 68.961,13.335 h1.3 r90
  text "-" at 71.12,13.335 h1.3 r90
  text "+" at 86.487,13.335 h1.3 r90
  text "-" at 88.646,13.335 h1.3 r90
  text "10" at 57.15,13.081 h1
  text "1" at 4.953,12.954 h1.52
  text "2" at 10.668,12.954 h1.52
  text "3" at 16.51,12.954 h1.52
  text "4" at 22.225,12.954 h1.52
  text "5" at 28.194,12.954 h1.52
  text "7" at 39.878,12.954 h1.52
  text "9" at 51.562,12.954 h1.52
  text "6" at 33.909,12.827 h1.52
  text "8" at 45.72,12.827 h1.52
  text "12V" at 59.309,12.065 h1.3
  text "-" at 1.778,11.811 h1.3
  text "-" at 7.62,11.811 h1.3
  text "-" at 13.335,11.811 h1.3
  text "-" at 19.304,11.811 h1.3
  text "-" at 25.146,11.811 h1.3
  text "-" at 30.988,11.811 h1.3
  text "-" at 36.83,11.811 h1.3
  text "-" at 42.672,11.811 h1.3
  text "-" at 48.514,11.811 h1.3
  text "-" at 54.356,11.811 h1.3
  text "POWER" at 57.912,10.668 h1
  text "2" at 69.977,10.668 h1.52 r90
  text "2" at 87.503,10.668 h1.52 r90
  text "AI PCB" at 41.402,9.271 h1.2
  text "+" at 60.706,9.271 h1.3
  text "-" at 58.039,9.017 h1.3
  text "1uF" at 51.435,7.747 h1.1
  text "-" at 71.12,7.62 h1.3 r90
  text "-" at 88.646,7.62 h1.3 r90
  text "100K" at 42.545,7.493 h1
  text "+" at 68.961,7.493 h1.3 r90
  text "+" at 86.487,7.493 h1.3 r90
  text "LM3915" at 78.232,6.858 h2.4 r90
  text "LM3915" at 95.758,6.858 h2.4 r90
  text "1N4007" at 29.21,5.461 h1
  text "GND" at 57.023,4.953 h0.6
  text "SIGNAL" at 59.563,4.953 h0.6
  text "1" at 69.977,4.953 h1.52 r90
  text "1" at 87.503,4.953 h1.52 r90
  text "LM3915" at 6.858,4.699 h2.4
  text "2.2K" at 42.418,4.699 h1
  text "2.2K" at 42.418,2.286 h1
  text "+" at 68.961,1.778 h1.3 r90
  text "-" at 71.12,1.778 h1.3 r90
  text "+" at 86.487,1.778 h1.3 r90
  text "-" at 88.646,1.778 h1.3 r90
  text "1N4007" at 29.337,0.889 h1
  text "VU" at 36.195,0.889 h1.6
  text "DOT/BAR" at 49.403,0.889 h1
  text "AUDIO" at 57.404,0.889 h1
  text "METER" at 39.243,0.762 h0.9
Bottom Overlay:
  text "A.I. PCB" at 14.605,97.409 h1.4
  text "A.I. PCB" at 36.195,97.409 h1.4
  text "A.I. PCB" at 57.531,97.409 h1.4
  text "DARK SENSITIVE" at 0.889,87.249 h1 r270
  text "DARK SENSITIVE" at 22.479,87.249 h1 r270
  text "DARK SENSITIVE" at 43.815,87.249 h1 r270
  text "AI PCB" at 50.292,78.105 h2
  text "VU METER" at 39.243,73.787 h1.9
  text "A.I. PCB" at 93.472,73.152 h2
  text "10 LED" at 35.941,69.723 h1.52
  text "To select the dot mode or / bar mode put or remove / the jumper from two / pin header" at 29.972,65.024 h0.8
  text "AI PCB" at 50.292,60.96 h2
  text "VU METER" at 39.243,56.642 h1.9
  text "10 LED" at 35.941,52.578 h1.52
  text "AI PCB" at 73.533,50.165 h2 r90
  text "AI PCB" at 91.059,50.165 h2 r90
  text "To select the dot mode or / bar mode put or remove / the jumper from two / pin header" at 29.972,47.879 h0.8
  text "AI PCB" at 50.292,44.069 h2
  text "VU METER" at 39.243,39.751 h1.9
  text "VU METER" at 77.851,39.116 h1.9 r90
  text "VU METER" at 95.377,39.116 h1.9 r90
  text "10 LED" at 81.915,35.814 h1.52 r90
  text "10 LED" at 99.441,35.814 h1.52 r90
  text "10 LED" at 35.941,35.687 h1.52
  text "To select the dot mode or / bar mode put or remove / the jumper from two / pin header" at 29.972,30.988 h0.8
  text "To select the dot mode or / bar mode put or remove / the jumper from two / pin header" at 86.614,29.845 h0.8 r90
  text "To select the dot mode or / bar mode put or remove / the jumper from two / pin header" at 104.14,29.845 h0.8 r90
  text "AI PCB" at 50.292,26.67 h2
  text "VU METER" at 39.243,22.352 h1.9
  text "10 LED" at 35.941,18.288 h1.52
  text "To select the dot mode or / bar mode put or remove / the jumper from two / pin header" at 29.972,13.589 h0.8
  text "AI PCB" at 50.165,9.398 h2
  text "VU METER" at 39.116,5.08 h1.9
  text "10 LED" at 35.814,1.016 h1.52
  text "To select the dot mode or / bar mode put or remove / the jumper from two / pin header" at 29.845,-3.683 h0.8